# Altium PCB PCB_of_Schematic.PcbDoc
Units mil, origin at the board's own origin, x right, y up, seen from the top; angles counter-clockwise.
Board outline 3890 x 2460 mil, 2 copper layers (Top Layer, Bottom Layer); 49 components, 38 nets, 145 pads, 21 vias.
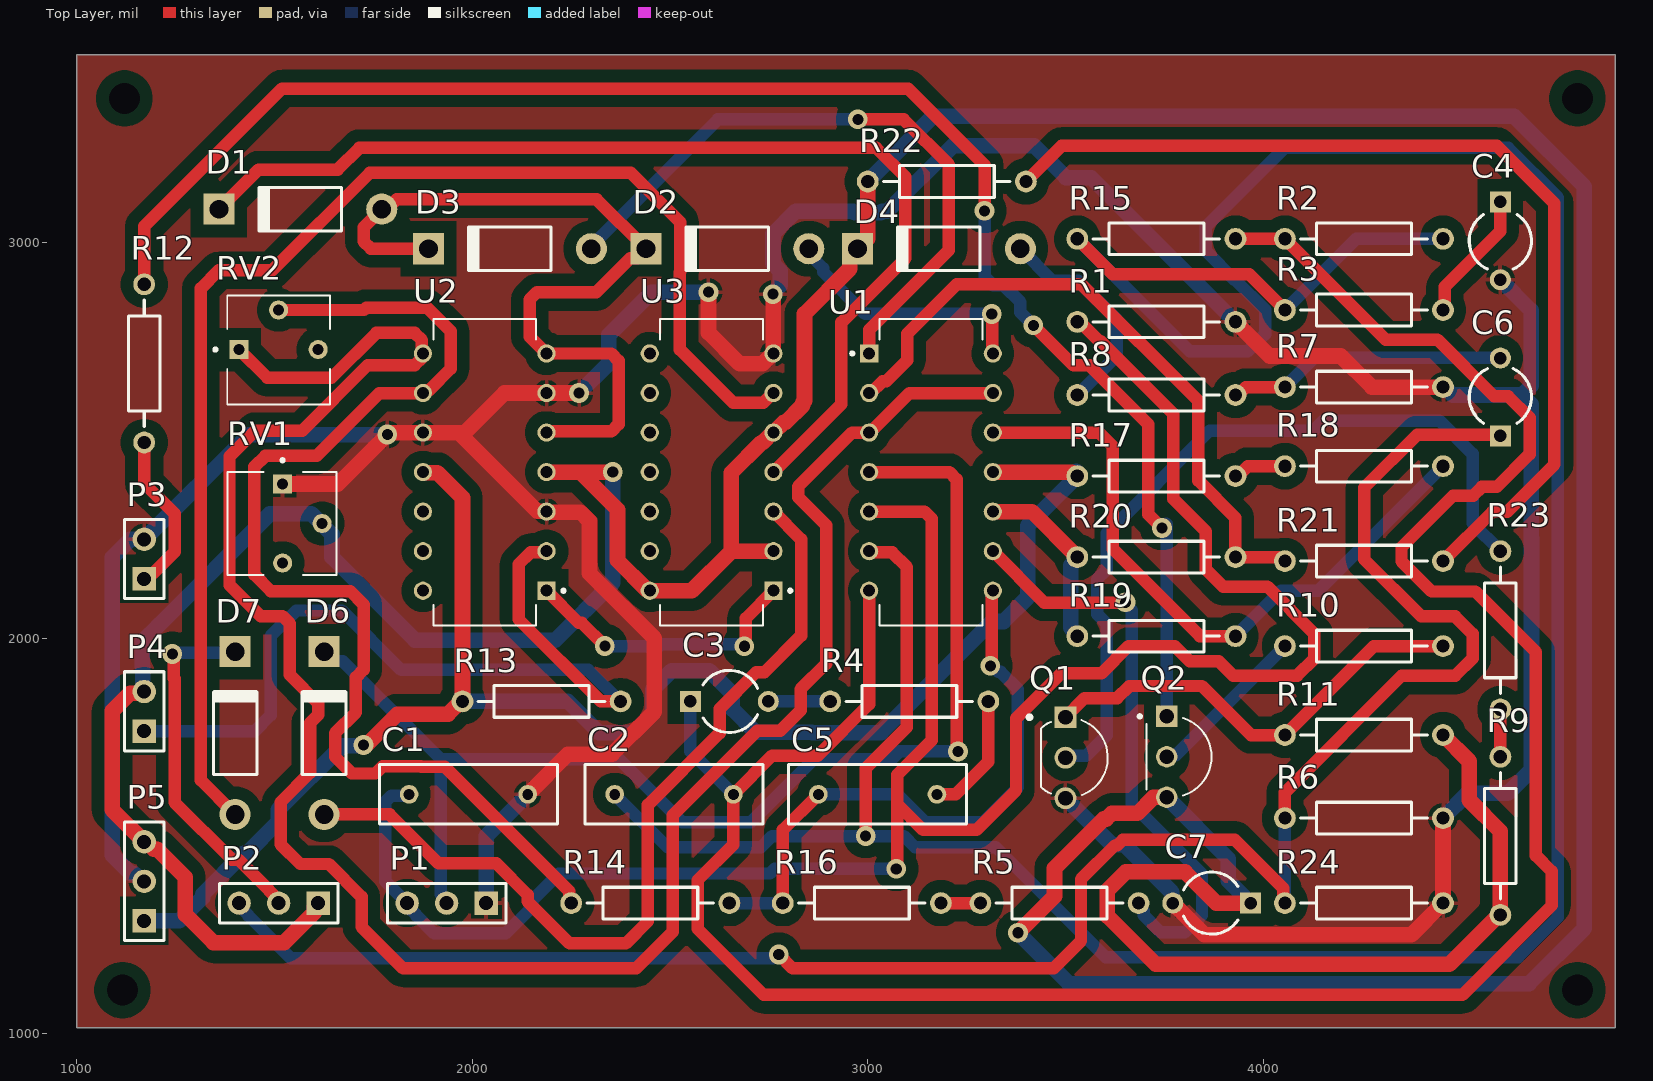
[diagram p0: Top Layer view]
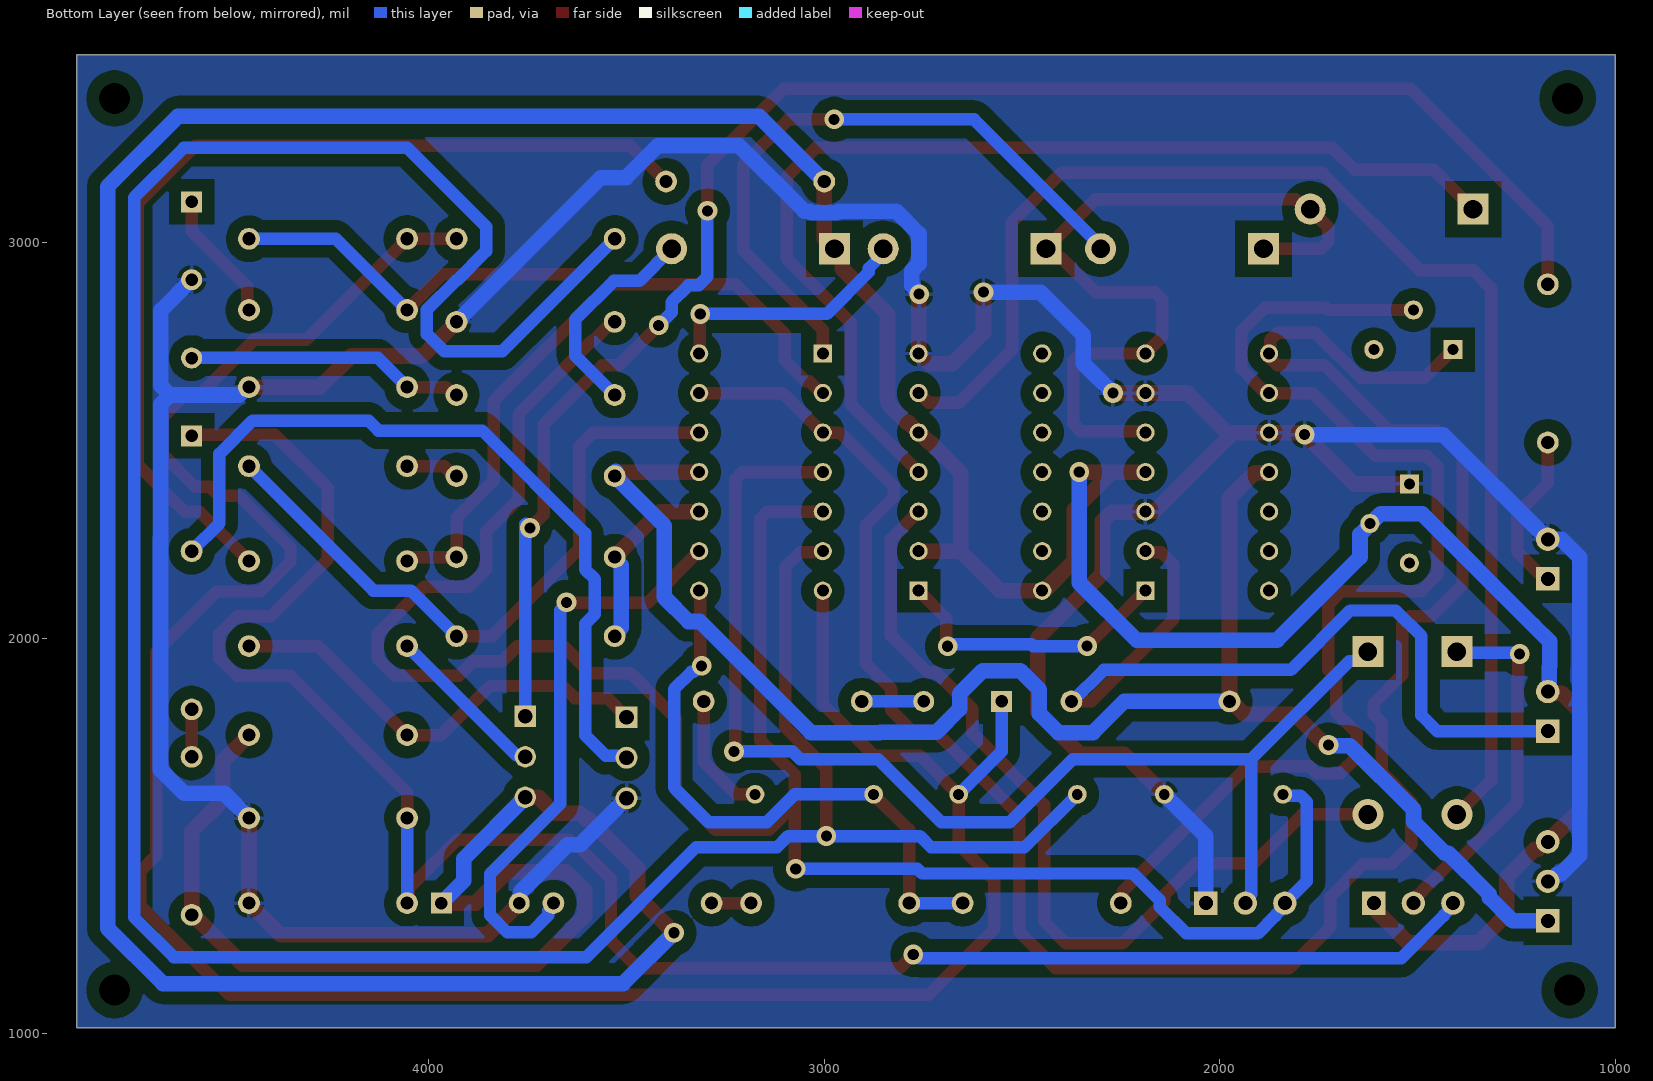
[diagram p1: Bottom Layer view, seen from below]

## Layer stack, top to bottom
Top Solder: solder mask 0.4, Solder Resist, Dk 3.5
Top Layer: signal copper 1.4
Dielectric 1: dielectric 12.6, FR-4, Dk 4.8
Bottom Layer: signal copper 1.4
Bottom Solder: solder mask 0.4, Solder Resist, Dk 3.5

## Board outline
1000,3475 1000,1015 4890,1015 4890,3475

## Design rules (kind name [scope] priority, off if disabled: settings)
Clearance [All] p1: gap=31.5 ignorepadtopadclearanceinfootprint=FALSE
PolygonConnect [All] p1: connectstyle=Relief reliefconductorwidth=10 reliefentries=4 polygonreliefangle="90 Angle" airgapwidth=10
RoutingVias [All] p1: holewidth=28 width=50 viastyle="Through Hole" minholewidth=28 minwidth=50 maxholewidth=28 maxwidth=50
SolderMaskExpansion [All] p1: expansion=4 istentingtop=FALSE
Width Width_1 [InNet('+5V') or InNet('-5V') or InNet('GND') or InNet('0V')] p1: maxlimit=39.37 minlimit=39.37 preferedwidth=39.37
Width [All] p2: maxlimit=31.5 minlimit=31.5 preferedwidth=31.5
30 further rules are at their usual default settings.

## Components (designator, comment, footprint, x,y, rotation, side; value= is the part's Value field where it differs from the comment)
C1 "Cap" RAD-0.3 1990,1605 r0 top value=100nf
C2 "Cap" RAD-0.3 2510,1605 r0 top value=10nf
C3 "Cap2" CAPR5-4X5 2650,1840 r0 top value=10uf
C4 "Cap2" CAPR5-4X5 4600,3005 r270 top value=47uf
C5 "Cap" RAD-0.3 3025,1605 r180 top value=10nf
C6 "Cap2" CAPR5-4X5 4600,2610 r90 top value=100uf
C7 "Cap2" CAPR5-4X5 3870,1330 r180 top value=50uf
D1 "Diode 1N4007" DO-41 1565,3085 r180 top
D2 "Diode 1N4007" DO-41 2645,2985 r180 top
D3 "Diode 1N4007" DO-41 2095,2985 r180 top
D4 "Diode 1N4007" DO-41 3180,2985 r180 top
D6 "Diode 1N4007" DO-41 1625,1760 r90 top
D7 "Diode 1N4007" DO-41 1400,1760 r90 top
P1 "Header 3" HDR1X3 2035,1330 r180 top
P2 "Header 3" HDR1X3 1610,1330 r180 top
P3 "Header 2" HDR1X2 1170,2150 r90 top
P4 "Header 2" HDR1X2 1170,1765 r90 top
P5 "Header 3" HDR1X3 1170,1285 r90 top
Q1 "BC547" TO92260P520H877-3 3538.88,1697.64 r270 top
Q2 "BC557" TO92260P520H933-3 3800,1700 r270 top
R1 "Res2" AXIAL-0.4 3730,2800 r0 top value=47K
R2 "Res2" AXIAL-0.4 4255,3010 r180 top value=1M
R3 "Res2" AXIAL-0.4 4255,2830 r180 top value=10K
R4 "Res2" AXIAL-0.4 3105,1840 r0 top value=10K
R5 "Res2" AXIAL-0.4 3485,1330 r180 top value=2M
R6 "Res2" AXIAL-0.4 4255,1545 r180 top value=1K
R7 "Res2" AXIAL-0.4 4255,2635 r180 top value=100
R8 "Res2" AXIAL-0.4 3730,2615 r0 top value=100
R9 "Res2" AXIAL-0.4 4600,1500 r270 top value=2K
R10 "Res2" AXIAL-0.4 4255,1980 r0 top value=1K
R11 "Res2" AXIAL-0.4 4255,1755 r0 top value=2K
R12 "Res2" AXIAL-0.4 1170,2695 r90 top value=220
R13 "Res2" AXIAL-0.4 2175,1840 r0 top value=100K
R14 "Res2" AXIAL-0.4 2450,1330 r180 top value=100K
R15 "Res2" AXIAL-0.4 3730,3010 r0 top value=1M
R16 "Res2" AXIAL-0.4 2985,1330 r180 top value=1M
R17 "Res2" AXIAL-0.4 3730,2410 r0 top value=1K
R18 "Res2" AXIAL-0.4 4255,2435 r0 top value=2K
R19 "Res2" AXIAL-0.4 3730,2005 r180 top value=1K
R20 "Res2" AXIAL-0.4 3730,2205 r0 top value=1K
R21 "Res2" AXIAL-0.4 4255,2195 r0 top value=2K
R22 "Res2" AXIAL-0.4 3200,3155 r180 top value=1K
R23 "Res2" AXIAL-0.4 4600,2020 r270 top value=2K
R24 "Res2" AXIAL-0.4 4255,1330 r180 top value=1K
RV1 "3362P-1-501" TRIM_3362P-1-501 1520,2290 r270 top value=100K
RV2 "3362P-1-501" TRIM_3362P-1-501 1510,2730 r0 top value=50K
U1 "TL074CN" DIP794W45P254L1969H508Q14 3160,2420 r0 top
U2 "TL074CN" DIP794W45P254L1969H508Q14 2031.3,2420 r180 top
U3 "SN74HC08N" DIP794W45P254L1969H508Q14 2605,2420 r180 top

## Footprints (in the part's own frame and the unit in brackets; to place one, negate y for a bottom-side part, rotate by r counter-clockwise, add the part's x,y. Pads: shape width x height; smd on the part's side, far side on the other; paste and mask are expansions set on the pad)
AXIAL-0.4 [mm] "Axial Device, Thru-Hole; 2 Leads; 0.4 in Pin Spacing"
  round 1.4 hole 0.85: 1(-5.08,0) 2(5.08,0)
  silkscreen extent -4.06,-1.02 4.06,1.02
CAPR5-4X5 [mm] "Capacitor; 2 Leads"
  rect 1.35x1.35 hole 0.8: 1(-2.5,0)
  round 1.35 hole 0.8: 2(2.5,0)
  silkscreen extent -1.69,-2 1.82,2
DIP794W45P254L1969H508Q14 [mm]
  rect 1.17x1.17 hole 0.77: 1(-3.97,7.62)
  round 1.17 hole 0.77: 2(-3.97,5.08) 3(-3.97,2.54) 4(-3.97,0) 5(-3.97,-2.54) 6(-3.97,-5.08) 7(-3.97,-7.62) 8(3.97,-7.62) 9(3.97,-5.08) 10(3.97,-2.54) 11(3.97,0) 12(3.97,2.54) 13(3.97,5.08) 14(3.97,7.62)
  silkscreen extent -5.15,-9.84 3.3,9.84
DO-41 [mm] "Diode, Axial; Body 5.2 x 2.7 mm (LxDia. max), Lead Dia. 0.86 mm (max)"
  round 2 hole 1.2: 1(-5.23,0)
  rect 2x2 hole 1.2: 2(5.23,0)
  silkscreen extent -2.65,-1.4 2.75,1.4
HDR1X2 [mm] "Connector; Header; 2 Position"
  rect 1.5x1.5 hole 0.9: 1(0,0)
  round 1.5 hole 0.9: 2(2.54,0)
  silkscreen extent -1.27,-1.27 3.81,1.27
HDR1X3 [mm] "Connector; Header; 3 Position"
  rect 1.5x1.5 hole 0.9: 1(0,0)
  round 1.5 hole 0.9: 2(2.54,0) 3(5.08,0)
  silkscreen extent -1.27,-1.27 6.35,1.27
RAD-0.3 [mm] "Radial Cap, Thru-Hole; 2 Leads; 0.3 in Pin Spacing"
  round 1.2 hole 0.7: 1(-3.81,0) 2(3.81,0)
  silkscreen extent -5.71,-1.91 5.71,1.91
TO92260P520H877-3 [mm]
  rect 1.41x1.41 hole 0.94: 1(-2.6,-0.988)
  round 1.41 hole 0.94: 2(0,-0.988) 3(2.6,-0.988)
  silkscreen extent -2.7,-3.4 2.39,1.73
TO92260P520H933-3 [mm]
  rect 1.37x1.37 hole 0.91: 1(-2.6,-1.112)
  round 1.37 hole 0.91: 2(0,-1.112) 3(2.6,-1.112)
  silkscreen extent -2.7,-2.94 2.49,1.77
TRIM_3362P-1-501 [mil]
  rect 48.11x48.11 hole 28.11: 1(-100,0)
  round 48.11 hole 28.11: 2(0,100) 3(100,0)
  silkscreen extent -164,-139 130,137, body extent -130,-138 130,138, height 192

## Part data
C1 C2 C3 C4 C5 C6 C7: "Capacitor", Publisher="Altium Limited"
  C1 C2 C5: LatestRevisionDate=17-Jul-2002, LatestRevisionNote="Re-released for DXP Platform.", PackageDescription="Radial Cap, Thru-Hole; 2 Leads; 0.3 in Pin Spacing", PackageReference=RAD-0.3, Published=8-Jun-2000
  C3 C4 C6 C7: PackageDescription="Capacitor; 2 Leads", PackageReference=CAPR5-4X5, Published=23-Sep-2002
D1 D2 D3 D4 D6 D7: "1 Amp General Purpose Rectifier", Code_JEDEC=DO-204-AL, ComponentLink1Description="Manufacturer Link", ComponentLink1URL=http://www.fairchildsemi.com/, ComponentLink2Description=Datasheet, ComponentLink2URL=http://www.fairchildsemi.com/ds/1N%2F1N4001.pdf, DatasheetVersion=1998, LatestRevisionDate=17-Jul-2002, LatestRevisionNote="Re-released for DXP Platform.", PackageDescription="Diode, Axial; Body 5.2 x 2.7 mm (LxDia. max), Lead Dia. 0.86 mm (max)", PackageReference=DO-41, PackageVersion=Aug-1999, Published=8-Jun-2000, Publisher="Altium Limited"
P1 P2 P5: "Header, 3-Pin", LatestRevisionDate=17-Jul-2002, LatestRevisionNote="Re-released for DXP Platform.", Publisher="Altium Limited"
P3 P4: "Header, 2-Pin", LatestRevisionDate=17-Jul-2002, LatestRevisionNote="Re-released for DXP Platform.", Publisher="Altium Limited"
Q1: library part BC547A, "Bipolar _BJT_ Transistor NPN 45V 100mA 300MHz 500mW Through Hole TO-92-3", Package="TO-92 NXP Semiconductors", Availability=Unavailable, MF="ON Semiconductor", MP=BC547A, Price=None, SnapEDA_Link=https://www.snapeda.com/parts/BC547A/ON%20Semiconductor/view-part/805861/?ref=snap
Q2: library part BC557AZL1G, "Bipolar (BJT) Transistor PNP 30V 100mA 150MHz 500mW Through Hole TO-92-3", Package=None, Availability=Unavailable, MP=BC557AZL1G, Price=None
R1 R2 R3 R4 R5 R6 R7 R8 R9 R10 R11 R12 R13 R14 R15 R16 R17 R18 R19 R20 R21 R22 R23 R24: "Resistor", LatestRevisionDate=17-Jul-2002, LatestRevisionNote="Re-released for DXP Platform.", PackageDescription="Axial Device, Thru-Hole; 2 Leads; 0.4 in Pin Spacing", PackageReference=AXIAL-0.4, Published=8-Jun-2000, Publisher="Altium Limited"
RV1 RV2: "500 Ohms 0.5W, 1/2W PC Pins Through Hole Trimmer Potentiometer Cermet 1.0 Turn Top Finger Adjustment", Package="3362P-1 Bourns Inc.", Availability="In Stock", Check_prices=https://www.snapeda.com/parts/3362P-1-501/Bourns/view-part/?ref=eda, MF=Bourns, MP=3362P-1-501, Price=None, Purchase-URL=https://pricing.snapeda.com/search/part/3362P-1-501/?ref=eda, SnapEDA_Link=https://www.snapeda.com/parts/3362P-1-501/Bourns/view-part/?ref=snap
U1 U2: "Quad Low-Noise JFET-Input General-Purpose Operational Amplifier 14-PDIP 0 to 70", Package="PDIP-14 Texas Instruments", Availability=Good, DigiKey-Purchase-URL=https://snapeda.com/shop?store=DigiKey&id=4796371, MF="Texas Instruments", Mouser-Purchase-URL=https://snapeda.com/shop?store=Mouser&id=4796371, MP=TL074CN, Price=None, SnapEDA_Link=https://www.snapeda.com/parts/TL074CN/Texas%20Instruments/view-part/4796371/?ref=snap, Texas_Instruments-Purchase-URL=https://snapeda.com/shop?store=Texas+Instruments&id=4796371
U3: "Quadruple 2-input positive-AND gates 14-PDIP -40 to 85", Package="PDIP-14 Texas Instruments", Arrow_Electronics-Purchase-URL=https://snapeda.com/shop?store=Arrow+Electronics&id=2878259, Availability=Good, BuyPart=https://www.snapeda.com/parts/SN74HC08N/Texas%20Instruments/view-part/2878259/?ref=eda, DigiKey-Purchase-URL=https://snapeda.com/shop?store=DigiKey&id=2878259, MF="Texas Instruments", Mouser-Purchase-URL=https://snapeda.com/shop?store=Mouser&id=2878259, MP=SN74HC08N, Price=None, SnapEDA_Link=https://www.snapeda.com/parts/SN74HC08N/Texas%20Instruments/view-part/2878259/?ref=snap

## Free pads (board coordinates)
  round 0 hole 78.74 unplated: 2(1115,1110) 3(1120,3365) 4(4795,3365) 5(4795,1110)

## Via types
v1: diameter 50, hole 28, Top Layer to Bottom Layer, 21 vias

## Nets (pads, with @x,y where several pads share a name; then routed paths per layer and width w, separated by ;. In a path a pad name is that pad's centre, name@x,y a point inside that pad or via, vN(x,y) a via of type N, cw(c..) or ccw(c..) an arc to the next point about the centre after c; other vN are vias at no path point)
0V: R19.2 R20.1 U1.10 | length 475.4
  Top Layer w39.37: U1.10 3415,2320 R20.1
  Bottom Layer w39.37: R19.2 3530,2009.26 3513.07,2026.19 3513.07,2183.81 3530,2200.74 R20.1
1IN-: P4.1 R13.2 U2.2 | length 2110.9
  Top Layer w31.5: U2.2 2184.81,2217.21 2147.21,2217.21 2117.32,2187.32 2117.32,2047.68 2325,1840 R13.2
  Bottom Layer w31.5: P4.1 1450,1765 1490,1805 1490,2005 1555,2070 1670,2070 1820,1920 2293.02,1920 2373.02,1840 R13.2
2IN+: D1.1 D2.2 D3.2 U2.5 U2.7 | length 2045.7
  Top Layer w31.5: D3.2 1743.45,2985 1725,3003.45 1725,3039.09 D1.1 1783.69,3085 1808.69,3110 2314.09,3110 D2.2 2415.47,2961.38 2399.77,2961.38 2313.4,2875 2163.45,2875 2145,2856.55 2145,2762.6 U2.7 2351.55,2720 2370,2701.55 2370,2541.24 2351.55,2522.79 2190.39,2522.79 U2.5
3IN-: R14.2 RV2.2 U2.9 | length 2931.9
  Top Layer w31.5: RV2.2 1725.92,2830 1731.31,2835.39 1886.43,2835.39 1945.28,2776.55 1945.28,2681.47 1891.09,2627.28 1886.23,2627.28 1878.94,2620 U2.9 1765,2620 1606.3,2461.3 1476.38,2461.3 1448.7,2433.62 1448.7,2160.47 1490.47,2118.7 1691.3,2118.7 1725,2085 1725,1920.35 1705.37,1900.72 1705.37,1812.54 1652.76,1759.92 1652.76,1700.08 1695.08,1657.76 1754.92,1657.76 1773.03,1675.87 1869.35,1675.87 1870.22,1675 1930,1675 2245.48,1359.52 2245.48,1334.52 R14.2
3OUT: RV2.1 U1.3 U1.13 U2.8 | length 5474.1
  Top Layer w31.5: RV2.1 1481.3,2658.7 1643.7,2658.7 1757.4,2772.4 1854.11,2772.4 1872.56,2753.95 1872.56,2722.44 U2.8 1872.21,2717.21 1872.21,2708.73 1853.76,2690.28 1735.28,2690.28 1569.29,2524.29 1450.28,2524.29 1385.71,2459.72 1385.71,2134.37 1464.37,2055.71 1519.47,2055.71 1538.39,2036.79 1538.39,1906.97 1610,1835.35 1610,1806.25 1589.76,1786.02 1589.76,1659.76 1515,1585 1515,1478.45 1564.68,1428.77 1637.1,1428.77 1720,1345.87 1720,1270 1824.95,1165.05 2414.14,1165.05 2507.01,1257.92 2507.01,1552.23 2720.96,1766.18 2779,1766.18 2830.2,1817.38 2830.2,1870.98 2894.57,1935.35 2894.57,2286.12 2823.73,2356.95 2823.73,2383.05 2960.68,2520 3005.66,2520 3105.66,2620 U1.13
+1.25V: R20.2 R21.1 U1.2 | length 1670.4
  Top Layer w31.5: U1.2 3007.64,2620 3037.37,2649.72 3046.3,2649.72 3100,2703.42 3100,2770 3225,2895 3540.79,2895 3835.98,2599.8 3835.98,2398.23 3930,2304.21 R20.2 4038.61,2205 4048.61,2195 R21.1
+5V: C7.1 D4.2 P2.1 P4.2 P5.3 Q2.3 R9.2 R11.2 R22.2 RV1.2 U2.4 U3.2 U3.5 U3.14 | length 13436.9
  Top Layer w39.37: P4.2 1166.23,1861.23 1134.8,1861.23 1089.29,1815.73 1089.29,1565.71 P5.3 1175.33,1485 1194.62,1465.71 1203.43,1465.71 1274.22,1394.92 1274.22,1300.78 1345,1230 1524.14,1230 1600.16,1306.02 1600.16,1320.16 P2.1 ; U2.4 2272.14,2420 ; v1(2355,2420) 2272.14,2420 ; U3.2 2655,2220 ; R22.2 3000,3010.91 D4.2 2954.41,2965.32 2954.41,2934.41 2840,2820 2840,2600 2835.51,2595.51 2835.51,2589.26 2792.04,2545.79 2787.71,2545.79 2761.92,2520 2759.49,2520 2733.7,2494.21 2730.56,2494.21 2655,2418.65 2655,2220 ; v1(3380,1255) 3472.4,1347.4 3472.4,1418.06 3596.94,1542.6 3602.95,1542.6 3617.28,1556.93 3681.93,1556.93 3722.64,1597.64 Q2.3 ; C7.1 3881.54,1330 3802.8,1408.74 3652.38,1408.74 3606.26,1362.62 3606.26,1297.38 3728.64,1175 4470.74,1175 4595.74,1300 R9.2 4600,1511.36 4521.26,1590.1 4521.26,1688.74 R11.2 ; 2272.14,2420 2367.13,2325.01 2367.13,2196.62 2442.47,2121.28 2447.42,2121.28 U3.14 2555,2120 2655,2220
  Bottom Layer w39.37: P4.2 1166.23,1868.77 1166.23,1927.17 1164.96,1928.44 1164.96,1991.56 1205.87,2032.46 1488.17,2314.76 1592.87,2314.76 1617.63,2290 RV1.2 1620,2287.64 1645,2262.64 1645,2205 1855,1995 2210,1995 2355,2140 v1(2355,2420) ; R22.2 3165,3320 4634.65,3320 4812.6,3142.05 4812.6,1266.4 4672.46,1126.26 3508.74,1126.26 v1(3380,1255) ; Q2.3 3912.32,1441.52 3912.32,1386.1 C7.1
-1.25V: R18.2 R19.1 U1.12 | length 1682.4
  Top Layer w31.5: U1.12 3585,2520 3620.06,2484.94 3620.06,2225.06 3840.12,2005 R19.1
  Bottom Layer w31.5: R19.1 4045.2,2120.2 4140.2,2120.2 R18.2
-5V: P5.1 R13.1 R17.1 U1.11 U2.11 | length 4082.7
  Top Layer w39.37: v1(1725,1730) 1727.03,1732.03 1734.55,1732.03 1810.32,1807.8 1938.54,1807.8 1970.74,1840 R13.1 1975,2355 1911.17,2418.83 1876.17,2418.83 U2.11 ; U1.11 3515.74,2420 3525.74,2410 R17.1
  Bottom Layer w39.37: P5.1 1258.58,1285 1317.58,1343.99 1317.58,1351.72 1421.96,1456.1 1430.06,1456.1 1508.78,1534.81 1508.78,1565.93 1670.81,1727.97 1722.97,1727.97 v1(1725,1730) ; R13.1 2241.47,1840 2320.21,1761.26 2407.62,1761.26 2455.71,1809.35 2455.71,1869.66 2503.8,1917.76 2599.35,1917.76 2657.78,1859.32 2657.78,1820.68 2716.22,1762.24 2858.63,1762.24 2859.62,1761.26 3033.52,1761.26 3314.37,2042.11 3343.36,2042.11 3404.57,2103.32 3404.57,2284.57 R17.1 3526.99,2413.01 R17.1@3526.99,2422.08 ; U1.11 U1.11@3318.11,2420
AND_OUT1: D6.2 P1.2 U1.4 | length 3145.5
  Top Layer w31.5: U1.4 3206.55,2420 3225,2401.55 3225,1716.95 v1(3228.41,1713.54)
  Bottom Layer w31.5: D6.2 1648.62,1942.28 1672.05,1942.28 1920,1694.33 ; P1.2 1935,1337.46 1920,1352.46 1920,1694.33 ; v1(3228.41,1713.54) 3080.46,1713.54 3061.25,1694.33 2864.11,1694.33 2703.91,1534.13 2531.09,1534.13 2370.89,1694.33 1920,1694.33
AND_OUT2: D7.2 P2.2 | length 912.6
  Top Layer w31.5: v1(1241.14,1960) 1244.68,1956.46 1244.68,1898.89 1246.77,1896.8 1246.77,1584.83 1391.59,1440.01 1408.56,1440.01 1486.77,1361.8 1486.77,1360.69 1510,1337.46 P2.2
  Bottom Layer w31.5: v1(1241.14,1960) 1244.09,1962.95 1397.05,1962.95 D7.2
GND: C1.2 C4.2 C7.2 P1.1 P3.2 P5.2 Q1.3 R1.2 R6.1 R7.1 R24.1 RV1.1 U2.3 U2.6 U2.10 U3.7 | length 10519.9
  Top Layer w39.37: P5.2@1164.67,1385 P5.2 ; P3.2@1166.23,2246.23 P3.2 ; RV1.1 1660,2390 v1(1785,2515) 1787.88,2515 1792.88,2520 U2.10 1965,2520 ; C1.2 2241.95,1706.95 2353.3,1706.95 2460,1813.64 2460,2000 2296.26,2163.74 2296.26,2295.66 2273.2,2318.72 2188.88,2318.72 2186.32,2321.28 2163.72,2321.28 1965,2520 ; v1(2270,2620) U2.6 2081.3,2620 1981.3,2520 1965,2520 ; v1(2597.24,2875) 2597.24,2772.76 2675.79,2694.21 2734.1,2694.21 2759.89,2720 U3.7 2761.3,2868.7 v1(2760,2870) ; C7.2 3851.57,1250 4375,1250 R24.1 R6.1 ; R1.2 4016.26,2713.74 4196.26,2713.74 4275,2635 R7.1
  Bottom Layer w39.37: P5.2 1164.67,1385 1145.38,1404.29 1136.57,1404.29 1089.29,1451.57 1089.29,2204.29 1135,2250 P3.2 1435,2515 v1(1785,2515) ; P1.1 2035,1500 C1.2 ; v1(2270,2620) 2345,2695 2345,2766.94 2453.06,2875 v1(2597.24,2875) ; v1(2760,2870) 2760,2872.88 2778.86,2891.73 2778.86,2928.99 2760.35,2947.49 2760.35,3022.51 2817.85,3080 2963.64,3080 2967.38,3076.26 3032.62,3076.26 3036.36,3080 3050,3080 3215,3245 3421.36,3245 3501.36,3165 3565,3165 R1.2 ; Q1.3 3617.87,1477.4 3648.95,1477.4 3768.94,1357.42 3768.94,1332.64 C7.2 ; R6.1 4517.7,1607.7 4619.05,1607.7 4678.74,1667.38 4678.74,2252.62 4677.76,2253.6 4677.76,2591.94 4654.69,2615 ; R7.1 4459.26,2635 4479.26,2615 4654.69,2615 ; C4.2 4677.76,2828.82 4677.76,2638.06 4654.69,2615
INVERTING_IN2: C2.1 R2.1 R3.2 R15.1 U1.6 | length 8322
  Top Layer w31.5: v1(2994.82,1499.47) 2994.82,1670.8 3099.02,1775 3099.02,2179.75 3061.55,2217.21 3006.49,2217.21 U1.6 ; R15.1 3620,2920 3965,2920 R3.2
  Bottom Layer w31.5: C2.1 2493.86,1471.14 2730.01,1471.14 2758.33,1499.47 v1(2994.82,1499.47) 3091.23,1499.47 3119.55,1471.14 3323.86,1471.14 3601.81,1193.19 4644.74,1193.19 4745.67,1294.12 4745.67,3114.33 4620,3240 4054.21,3240 3855.2,3040.98 3855.2,2979.02 3929.21,2905 3930.79,2905 4004.8,2830.98 4004.8,2769.02 3960.98,2725.2 3814.8,2725.2 R15.1 ; R3.2 4235,3010 R2.1
INVERTING_IN3: R5.1 U1.9 | length 1480.7
  Top Layer w31.5: U1.9 3446.3,2090 3651.53,2090 v1(3652.24,2090.71)
  Bottom Layer w31.5: v1(3652.24,2090.71) 3652.24,2085.7 3667.8,2070.15 3667.8,1581.09 3845.39,1403.49 3845.39,1299.42 3802.15,1256.18 3741,1256.18 3697.76,1299.42 3697.76,1310.85 3685,1323.61 R5.1
NetC3_2: C3.2 R4.1 | length 156.6
  Bottom Layer w31.5: C3.2 R4.1
NetC4_1: C4.1 R3.1 | length 333.5
  Top Layer w31.5: R3.1 4459.52,2834.52 4459.52,2889.13 4600,3029.61 C4.1
NetC5_1: C5.1 R4.2 | length 316.4
  Top Layer w31.5: C5.1 3222.04,1605 3305,1687.96 R4.2
NetC6_1: C6.1 P2.3 R6.2 R24.2 | length 4930.2
  Top Layer w31.5: v1(2775,1200) 2810,1165 3470,1165 3539.33,1234.33 3539.33,1390.34 3624.66,1475.67 3630.67,1475.67 3645,1490 3928.39,1490 4050.48,1367.91 4050.48,1334.52 R24.2 ; R6.2 4055,1610 4350,1905 4485.79,1905 4529.8,1949.02 4529.8,2010.98 4485.79,2055 4400.13,2055 4255.79,2199.34 4255.79,2380.79 4390,2515 4596.57,2515 C6.1
  Bottom Layer w31.5: P2.3 1410,1322.54 1433.23,1299.31 1433.23,1298.2 1541.19,1190.24 2760.23,1190.24 2769.99,1200 v1(2775,1200) ; R24.2 R6.2
NetC6_2: C6.2 R7.2 R8.2 | length 709.8
  Top Layer w31.5: R8.2 3936.39,2615 3956.39,2635 R7.2
  Bottom Layer w31.5: R7.2 4129.8,2709.8 4598.62,2709.8 C6.2
NetD4_1: D4.1 R8.1 | length 550.5
  Bottom Layer w31.5: D4.1 3467.43,2903.47 3532.32,2903.47 3629.91,2805.88 3629.91,2714.91 R8.1
NetP3_1: P3.1 R12.1 | length 413.6
  Top Layer w31.5: P3.1 1183.78,2163.78 1192.35,2163.78 1246.77,2218.2 1246.77,2315.02 1170,2391.79 R12.1
NetQ1_1: Q1.1 R10.2 R11.1 | length 1132.3
  Top Layer w31.5: Q1.1 3548.17,1848.17 3630.67,1848.17 3661.52,1879.02 3845.29,1879.02 3969.3,1755 R11.1 4280,1980 R10.2
NetQ1_2: Q1.2 R23.1 | length 2012
  Bottom Layer w31.5: Q1.2 3504.6,1702.23 3552.23,1702.23 3604.8,1754.8 3604.8,2035.98 3580,2060.79 3580,2149.21 3604.8,2174.02 3604.8,2264.8 3865,2525 4127.5,2525 4152.5,2550 4445.79,2550 4529.8,2465.98 4529.8,2290.2 R23.1
NetQ2_1: Q2.1 R12.2 | length 4142.4
  Top Layer w31.5: R12.2 1170,3041.46 1518.54,3390 3101.92,3390 3295.4,3196.52 v1(3295.4,3080.8) ; v1(3418.84,2791.3) 3520.34,2689.8 3560.98,2689.8 3710,2540.79 3710,2312.83 v1(3743.92,2278.92)
  Bottom Layer w31.5: v1(3295.4,3080.8) 3295.4,2914.75 3317.9,2892.24 3343.59,2892.24 3385.91,2849.92 3385.91,2824.24 v1(3418.84,2791.3) ; v1(3743.92,2278.92) 3755,2290 3756.2,2288.8 Q2.1
NetQ2_2: Q2.2 R10.1 | length 414.8
  Bottom Layer w31.5: Q2.2 3760.49,1704.29 3779.29,1704.29 R10.1
NetR5_2: R5.2 R16.1 | length 100
  Top Layer w31.5: R16.1 R5.2
NetR9_1: R9.1 R23.2 | length 120
  Top Layer w31.5: R9.1 R23.2
NetR17_2: R17.2 R18.1 | length 135.4
  Top Layer w31.5: R17.2 3936.39,2410 3961.39,2435 R18.1
NetR21_2: R21.2 R22.1 | length 2477.7
  Top Layer w31.5: R22.1 3490,3245 4591.55,3245 4736.81,3099.74 4736.81,2439.34 4616.9,2319.43 4579.43,2319.43 R21.2
OP1_OUT: U2.1 U3.1 | length 733.1
  Top Layer w31.5: U2.1 2269.06,2038.54 2276.65,2038.54 v1(2335.07,1980.11) ; v1(2687.92,1979.57) 2691.46,1983.11 2691.46,2050.16 U3.1
  Bottom Layer w31.5: v1(2335.07,1980.11) 2471.5,1980.11 2476.08,1984.69 2677.8,1984.69 2682.91,1979.57 v1(2687.92,1979.57)
OR_OUT: D1.2 U3.4 | length 2715.3
  Top Layer w31.5: D1.2 1459.09,3185 1659.33,3185 1714.33,3240 3021.55,3240 3095,3166.55 3095,2960.35 2933.43,2798.78 2933.43,2592.13 U3.4
OUT1: D3.1 U1.1 | length 1652.6
  Top Layer w31.5: v1(2975,3312.24) 3090.59,3312.24 3205,3197.83 3205,2981.27 3003.7,2779.97 U1.1
  Bottom Layer w31.5: D3.1 2300.91,2992.36 2620.79,3312.24 v1(2975,3312.24)
OUT2: C2.2 C3.1 R2.2 R15.2 U1.7 | length 6278.1
  Top Layer w31.5: U1.7 3003.7,1832.91 2873.98,1703.19 2758.19,1703.19 C2.2 2660,1477.87 2570,1387.87 2570,1265 2736.93,1098.07 4503.86,1098.07 4730,1324.21 4730,1410 4690,1450 4690,1965 4537.01,2117.99 4426.22,2117.99 4350,2194.21 4350,2230 4480.2,2360.2 4531.11,2360.2 4553.34,2382.42 4590.81,2382.42 4673.82,2465.43 4673.82,2557.72 4619.69,2611.85 4583.94,2611.85 4440.59,2755.2 4309.8,2755.2 R2.2 R15.2
  Bottom Layer w31.5: C3.1 2551.57,1713.43 C2.2
OUT3: C5.2 R14.1 R16.2 U1.8 | length 1553.4
  Top Layer w31.5: R16.2 2785,1515 C5.2 ; v1(3310,1930) 3313.51,1933.51 3313.51,2117.21 U1.8
  Bottom Layer w31.5: R14.1 R16.2 ; C5.2 3074.78,1605 3145.65,1534.13 3291.55,1534.13 3379.8,1622.39 3379.8,1870.98 3335.98,1914.8 3330.2,1914.8 3315.01,1930 v1(3310,1930)
OUT4: D2.1 U1.14 | length 645.3
  Top Layer w31.5: v1(3313.66,2820) 3314.98,2818.68 3314.98,2721.32 U1.14
  Bottom Layer w31.5: D2.1 2850.91,2972.22 2887.48,2935.64 2887.48,2926.06 2993.54,2820 v1(3313.66,2820)
SOURCE: C1.1 P1.3 R1.1 U1.5 | length 5390.6
  Top Layer w31.5: U1.5 3143.56,2320 3162.01,2301.55 3162.01,1742.01 3075,1655 3075,1580 ; v1(3072.1,1416.67) 3075,1419.57 3075,1580 ; R1.1 3536.39,2800 3583.6,2752.8 3587.08,2752.8 3772.99,2566.88 3772.99,2352.01 3855.2,2269.8 3855.2,2174.02 3899.02,2130.2 4010.59,2130.2 4129.8,2010.98 4129.8,1949.02 4085.98,1905.2 3924.02,1905.2 3887.2,1942.01 3814.03,1942.01 3776.04,1980 3660,1980 3591.16,1911.16 3488.84,1911.16 3375,1797.33 3375,1615 3275,1515 3140,1515 3075,1580
  Bottom Layer w31.5: P1.3 1780,1385 1780,1586.55 1795.44,1601.99 1836.99,1601.99 C1.1 ; P1.3@1840.46,1335.46 1840.27,1335.27 1840.27,1317.27 1858.23,1299.31 1858.23,1298.2 1903.2,1253.23 2084.1,1253.23 2151.56,1320.69 2151.56,1337.34 2219.02,1404.8 2752.75,1404.8 2764.62,1416.67 v1(3072.1,1416.67)
Y1_AND: D6.1 U3.3 | length 2224.9
  Top Layer w31.5: D6.1 1790.69,1554.09 1914.42,1430.36 2060.51,1430.36 2139.76,1351.11 2139.76,1334.45 2246.17,1228.05 2388.05,1228.05 2444.02,1284.02 2444.02,1578.32 2625.39,1759.7 2625.39,1821.36 2717.85,1913.82 2738.82,1913.82 2831.57,2006.57 2831.57,2249.72 U3.3
Y2_AND: D7.1 U3.6 | length 3376.9
  Top Layer w31.5: D7.1 1313.39,1640.71 1313.39,2884.94 1358.45,2930 1493.41,2930 1740.42,3177.01 2401.16,3177.01 2525.71,3052.46 2525.71,2926.06 2525,2925.35 2525,2730 2660,2595 2735.57,2595 2760.57,2620 U3.6
pads on no net: RV1.3 RV2.3 U2.12 U2.13 U2.14 U3.8 U3.9 U3.10 U3.11 U3.12 U3.13

## Polygon pours and split planes (outlines as drawn)
GND on Top Layer "GND_L01_P001" (solid, pour order 1): 1000,3475 1000,1015 4890,1015 4890,3475
GND on Bottom Layer "GND_L02_P002" (solid, pour order 2): 1000,3475 1000,1015 4890,1015 4890,3475